# Altium PCB 双595.pcbdoc
Units mm, origin at the board's own origin, x right, y up, seen from the top; angles counter-clockwise.
Board outline 28.55 x 49.83 mm, 2 copper layers (Top Layer, Bottom Layer); 12 components, 155 nets, 89 pads, 42 vias.
Unrouted connection lines stored in the file: 101.
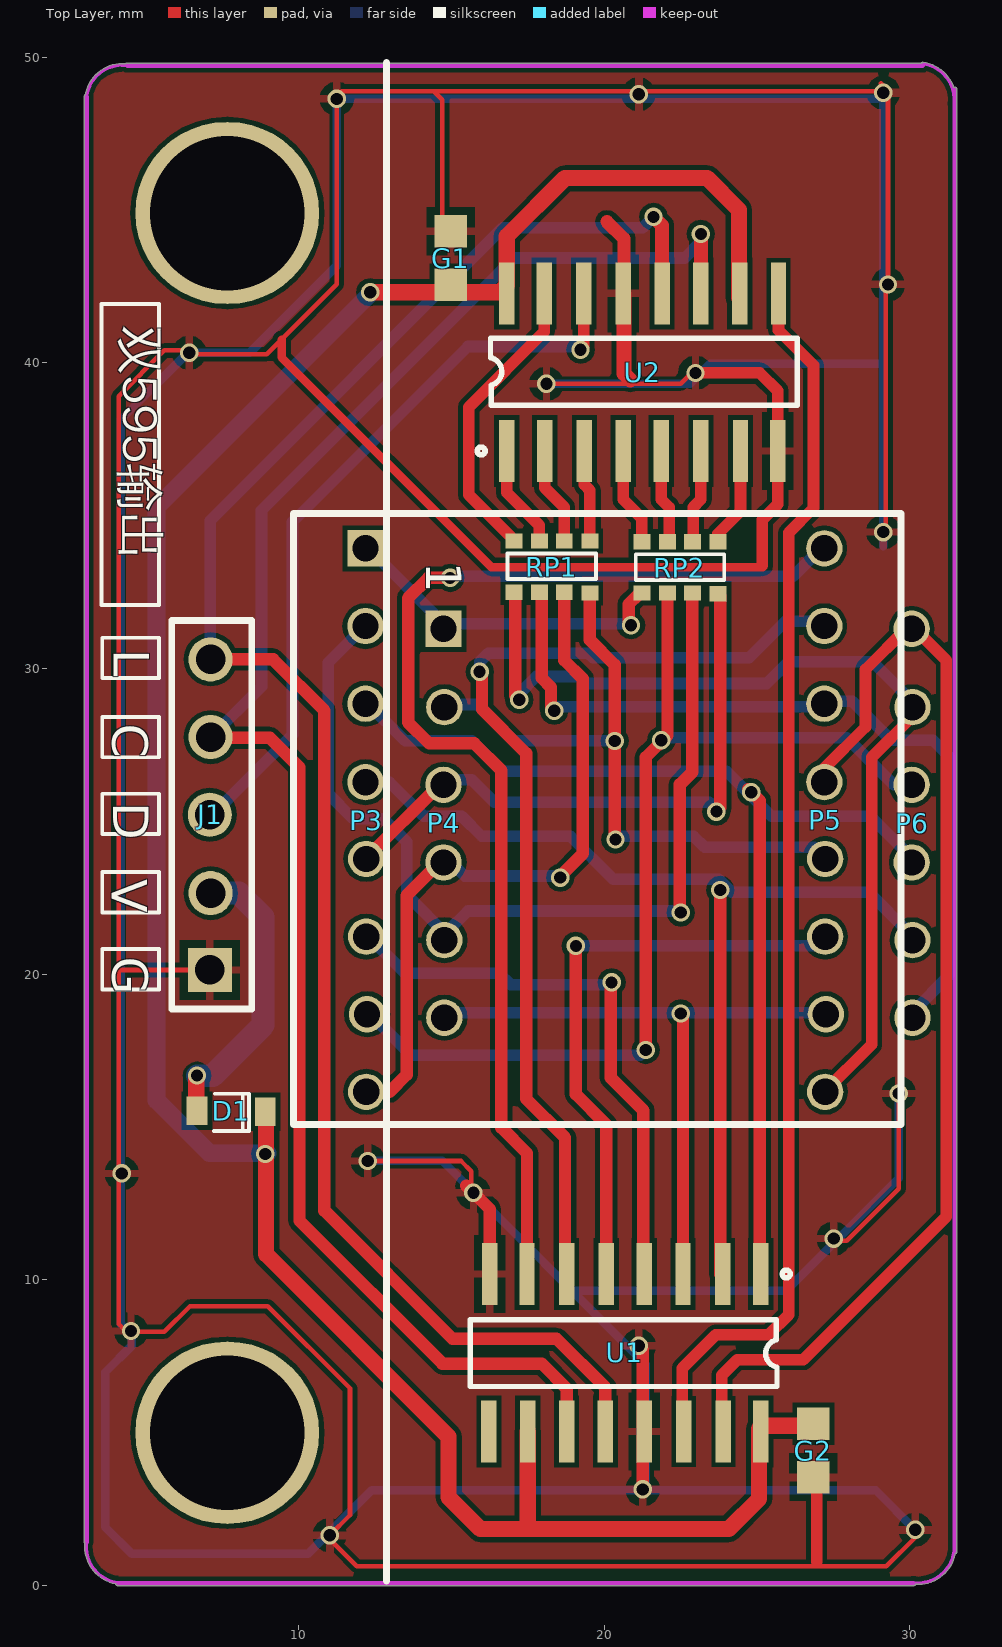
[diagram p0: Top Layer view]
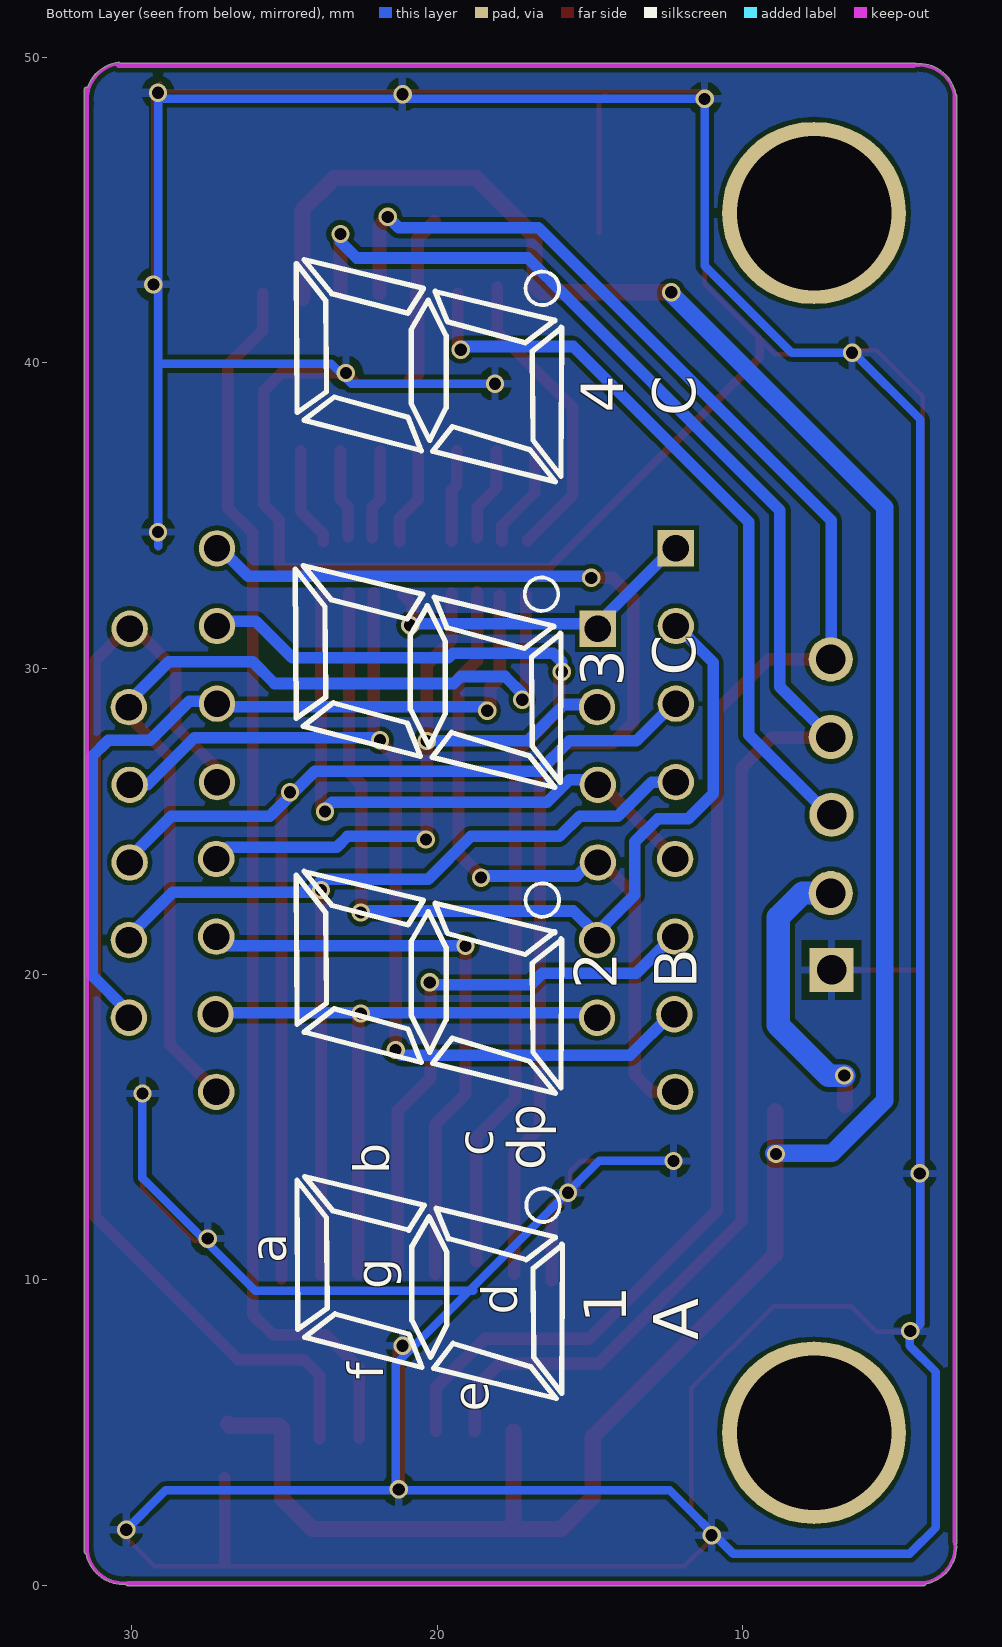
[diagram p1: Bottom Layer view, seen from below]

## Layer stack, top to bottom
Top Solder: solder mask 0.0102, Solder Resist, Dk 3.5
Top Layer: signal copper 0.0356
Dielectric 1: dielectric 0.32, FR-4, Dk 4.8
Bottom Layer: signal copper 0.0356
Bottom Solder: solder mask 0.0102, Solder Resist, Dk 3.5

## Board outline
3.017,1.373 ccw(c4.242,1.27) 4.015,0.062 ccw(c4.089,0.076) 4.089,0.001 30.124,0.001 ccw(c30.124,0.076) 30.192,0.043 ccw(c30.277,1.27) 31.485,1.044 ccw(c31.471,1.118) 31.546,1.118 31.546,48.946 ccw(c31.471,48.946) 31.44,49.015 ccw(c30.277,48.616) 30.436,49.835 ccw(c30.429,49.784) 30.384,49.809 4.394,49.809 ccw(c4.394,49.733) 4.345,49.79 ccw(c4.242,48.565) 3.031,48.78 ccw(c3.073,48.717) 2.998,48.717 2.998,1.422 ccw(c3.073,1.422)
cut-out: 31.474,48.946 cw(c31.524,48.946) 31.474,48.946 cw(c31.524,48.946) 31.474,48.947 cw(c30.534,48.946)
cut-out: 31.474,48.946 cw(c31.524,48.946) 31.474,48.946 cw(c31.524,48.946) 31.474,48.947 cw(c30.534,48.946)

## Design rules (kind name [scope] priority, off if disabled: settings)
Clearance [All] p1: gap=0.152 ignorepadtopadclearanceinfootprint=FALSE
HoleToHoleClearance [All] p1: gap=0.203 allowstackedmicrovias=TRUE
PolygonConnect [All] p1: connectstyle=Relief reliefconductorwidth=0.254 reliefentries=4 polygonreliefangle="90 Angle" airgapwidth=0.254
RoutingVias [All] p1: holewidth=6 width=8 viastyle="Through Hole" minholewidth=0.3 minwidth=0.6 maxholewidth=0.711 maxwidth=1.27
SilkToSilkClearance [All] p1: silktosilkclearance=0.152
SolderMaskExpansion [All] p1: expansion=0.102
Width [All] p1: maxlimit=5 minlimit=0.203 preferedwidth=0.254
28 further rules are at their usual default settings.

## Components (designator, comment, footprint, x,y, rotation, side; value= is the part's Value field where it differs from the comment)
D1 "S4" COMPONENT_6 7.798,15.519 r0 top
G1 "104" COMPONENT_5 14.989,43.434 r180 top
G2 "104" COMPONENT_5 26.851,4.42 r180 top
J1 "2.54排针5P黑色" COMPONENT_1 7.115,25.222 r0 top
P3 "8P圆孔排母DS18B20" COMPONENT_2#1 12.22,25.044 r0 top
P4 "6P圆孔排母DS18B20" COMPONENT_3#1 14.76,24.943 r0 top
P5 "8P圆孔排母DS18B20" COMPONENT_2#2 27.232,25.044 r0 top
P6 "6P圆孔排母DS18B20" COMPONENT_3#2 30.076,24.943 r0 top
RP1 "220R" COMPONENT_7 18.291,33.325 r0 top
RP2 "220R" COMPONENT_7 22.482,33.299 r0 top
U1 "74HC595D" COMPONENT_4 20.678,7.62 r180 top
U2 "74HC595D" COMPONENT_4 21.263,39.7 r0 top

## Footprints (in the part's own frame and the unit in brackets; to place one, negate y for a bottom-side part, rotate by r counter-clockwise, add the part's x,y. Pads: shape width x height; smd on the part's side, far side on the other; paste and mask are expansions set on the pad)
COMPONENT_1 [mil]
  rect 56.84x56.84 hole 38: 1(-0.5,-200)
  round 56.84 hole 38: 2(0.5,-101) 3(-0.5,0) 4(0.5,100) 5(0.5,200)
  silkscreen extent -50,-250 54,250
COMPONENT_2#1 [mil]
  rect 46.84x46.84 hole 34: 1(-1,350)
  round 46.84 hole 34: 2(-1,250) 3(-1,150) 4(-1,49) 5(0,-50) 6(0,-150) 7(1,-250) 8(0,-350)
COMPONENT_2#2 [mil]
  round 46.84 hole 34: 1(-1,350) 2(-1,250) 3(-1,150) 4(-1,49) 5(0,-50) 6(0,-150) 7(1,-250) 8(0,-350)
COMPONENT_3#1 [mil]
  rect 46.84x46.84 hole 34: 1(-0.5,250.5)
  round 46.84 hole 34: 2(0.5,149.5) 3(-0.5,49.5) 4(-0.5,-50.5) 5(0.5,-150.5) 6(0.5,-250.5)
COMPONENT_3#2 [mil]
  round 46.84 hole 34: 1(-0.5,250.5) 2(0.5,149.5) 3(-0.5,49.5) 4(-0.5,-50.5) 5(0.5,-150.5) 6(0.5,-250.5)
COMPONENT_4 [mil]
  rect 19.84x79.84 smd: 1(-175,-101.5) 2(-126,-101.5) 3(-75,-101.5) 4(-25,-101.5) 5(24,-101.5) 6(75,-101.5) 7(126,-101.5) 8(174,-101.5) 9(175,101.5) 10(125,101.5) 11(75,101.5) 12(25,101.5) 13(-25,101.5) 14(-76,101.5) 15(-127,101.5) 16(-175,101.5)
  silkscreen extent -213,-107 199,44
COMPONENT_5 [mil]
  rect 41.84x41.84 smd: 1(0,34.5) 2(0,-34.5)
COMPONENT_6 [mil]
  rect 26.84x36.84 smd: 1(-44,0.5) 2(44,-0.5)
  silkscreen extent -22,-26 23,22
COMPONENT_7 [mil]
  rect 21.84x19.84 smd: 1(-49,33.5) 2(-49,-32.5) 3(-16,33.5) 4(-16,-32.5) 5(16,33.5) 6(16,-32.5) 7(49,33.5) 8(49,-33.5)
  silkscreen extent -57,-16 57,18

## Free pads (board coordinates)
  oval 6.016x5.965 hole 5.055: 9(7.674,44.907) 10(7.674,5.004)

## Via types
v1: diameter 0.6, hole 0.4, Top Layer to Bottom Layer, tented both sides, 41 vias
v2: diameter 0.8, hole 0.4, Top Layer to Bottom Layer, 1 vias

## Nets (pads, with @x,y where several pads share a name; then routed paths per layer and width w, separated by ;. In a path a pad name is that pad's centre, name@x,y a point inside that pad or via, vN(x,y) a via of type N, cw(c..) or ccw(c..) an arc to the next point about the centre after c; other vN are vias at no path point)
3.3V: 
+5v: 
AOUT1: 
AOUT2: 
BOUT1: 
BOUT2: 
D+: 
D-: 
DTR: 
GND: 
M11: 
M12: 
M21: 
M22: 
Net: 
NewNet1: 
NewNet2: 
NewNet3: 
NewNet4: 
NewNet15: 
NewNet16: 
NewNet17: 
NewNet18: 
NewNet19: 
NewNet20: 
NewNet21: 
NewNet22: 
NewNet23: 
NewNet24: 
NewNet25: 
NewNet26: 
NewNet27: 
NewNet28: 
NewNet29: 
NewNet30: 
NewNet31: 
NewNet32: 
NewNet33: 
NewNet34: 
NewNet35: 
NewNet36: 
NewNet37: 
NewNet38: 
NewNet39: 
NewNet40: 
NewNet41: 
NewNet42: 
NewNet43: 
NewNet44: 
NewNet45: 
NewNet46: 
NewNet47: 
NewNet48: 
NewNet49: 
NewNet50: 
NewNet51: 
NewNet52: 
NewNet53: 
NewNet54: 
NewNet55: 
NewNet56: 
NewNet57: 
NewNet58: 
NewNet59: 
NewNet60: 
NewNet61: 
NewNet62: 
NewNet63: 
NewNet64: 
NewNet65: 
NewNet66: 
NewNet67: 
NewNet68: 
NewNet69: 
NewNet70: 
NewNet71: 
NewNet72: 
NewNet73: 
NewNet74: 
NewNet75: 
NewNet76: 
NewNet77: P5.3 P6.6 RP1.4 | length 26.7
  Top Layer w0.405: RP1.4@17.961,32.385 17.961,29.693 18.265,29.388 v1@18.265,28.651
  Bottom Layer w0.379: v1(18.367,28.626) 18.494,28.753 26.876,28.753 27.054,28.931 28.121,28.931 29.391,27.661 30.762,27.661 31.296,27.127 31.296,19.964 30.089,18.758 P6.6
NewNet78: P3.4 P6.5 U1.2 | length 32.3
  Top Layer w0.405: U1.2@23.803,10.185 v1(23.803,22.758)
  Bottom Layer w0.379: P3.4@12.423,26.289 12.982,26.289 14.1,25.171 15.344,25.171 16.005,24.511 18.9,24.511 20.297,23.114 23.752,23.114 24.184,22.682 28.654,22.682 30.026,21.311 P6.5@30.026,21.209
NewNet79: P3.3 P6.4 U1.1 | length 36.1
  Top Layer w0.405: v1@24.717,26.06 25.098,25.679 U1.1@25.098,10.058
  Bottom Layer w0.379: P3.3 12.271,28.854 13.49,27.635 15.675,27.635 16.665,26.645 24.006,26.645 25.479,25.171 28.705,25.171 P6.4@30.064,23.812
  other v1: 24.819,25.959
NewNet80: P3.7 P6.3 RP2.4 | length 33.9
  Top Layer w0.405: v1(21.364,17.526) 21.364,27.102 22.075,27.813 RP2.4
  Bottom Layer w0.379: P3.7 12.347,18.694 13.693,17.348 21.186,17.348 v1(21.364,17.526) ; v1(21.872,27.661) 21.948,27.737 27.943,27.737 29.48,26.2 P6.3
NewNet81: P5.8 P6.2 RP1.2 | length 31.7
  Top Layer w0.379: P5.8@27.155,16.104 28.756,17.704 28.756,27.102 30.089,28.435 P6.2
  Top Layer w0.405: RP1.2@17.097,32.385 17.097,29.108 v1(17.224,28.981)
  Bottom Layer w0.379: v1(17.224,28.981) 17.224,29.185 17.783,29.743 19.231,29.743 19.459,29.515 25.327,29.515 26.038,30.226 28.781,30.226 30.089,28.918 P6.2
NewNet82: P5.4 P6.1 U1.15 | length 37.4
  Top Layer w0.379: U1.15@23.853,4.801 23.853,6.883 24.361,7.391 26.52,7.391 31.194,12.065 31.194,30.277 P6.1@30.165,31.305 ; P5.4 27.206,26.746 28.552,28.092 28.552,29.972 P6.1@29.886,31.305
NewNet83: P4.6 P5.7 U1.3 | length 21.1
  Top Layer w0.405: v1(22.507,18.72) 22.583,18.644 U1.3
  Bottom Layer w0.379: P4.6 15.103,18.58 15.268,18.745 27.206,18.745 P5.7
NewNet84: P3.2 P4.5 RP2.6 | length 31.7
  Top Layer w0.405: v1@22.482,22.047 22.482,26.213 22.888,26.619 RP2.6
  Bottom Layer w0.379: P3.2@12.271,31.445 12.22,31.445 10.976,30.201 10.976,25.908 11.788,25.095 12.779,25.095 13.541,24.333 13.541,22.606 14.913,21.234 14.913,21.438 15.548,22.073 v1@22.558,22.073
  other v1: 22.507,22.022
NewNet85: P3.8 P4.4 RP1.6 | length 22.9
  Top Layer w0.405: P3.8 12.982,16.154 13.541,16.713 13.541,22.581 14.621,23.66 P4.4 ; v1(18.57,23.165) 18.57,23.216 19.307,23.952 19.307,29.667 18.697,30.277 RP1.6
  Bottom Layer w0.379: P4.4 15.002,23.66 15.446,23.216 v1@18.519,23.216
NewNet86: P3.5 P4.3 RP2.8 | length 19.9
  Top Layer w0.405: P3.5 12.22,23.8 P4.3@14.633,26.213 ; v1(23.676,25.324) 23.803,25.451 RP2.8@23.803,32.372
  Bottom Layer w0.379: P4.3 14.913,26.365 15.675,26.365 16.411,25.629 23.447,25.629 v1@23.676,25.4
NewNet87: P4.2 P5.5 RP1.8 | length 21.3
  Top Layer w0.405: RP1.8 19.535,30.937 20.348,30.124 v1@20.348,24.46
  Bottom Layer w0.379: P4.2@14.989,28.829 15.852,28.829 17.046,27.635 v1(20.348,27.635) ; v1(20.374,24.409) 20.475,24.511 22.939,24.511 23.295,24.155 26.876,24.155 P5.5@27.155,23.876
NewNet88: P3.1 P4.1 RP2.2 | length 10.9
  Top Layer w0.405: v1@20.805,31.394 20.805,32.106 RP2.2@21.11,32.41
  Bottom Layer w0.379: P3.1@12.144,34.061 12.169,34.061 14.76,31.471 v1@20.831,31.471
  other v1: 20.882,31.42
NewNet89: P5.6 U1.5 | length 19.6
  Top Layer w0.405: v1@19.078,21.006 19.078,16.078 20.069,15.088 U1.5
  Bottom Layer w0.379: v1(19.078,20.93) 26.978,20.93 P5.6@27.308,21.26
NewNet90: P5.2 U1.6 | length 32.9
  Top Layer w0.405: v1@15.929,29.972 16.005,29.896 16.005,28.677 17.453,27.229 17.453,15.926 18.723,14.656 U1.6@18.723,10.617
  Bottom Layer w0.379: v1(15.929,29.896) 15.929,30.226 16.208,30.505 19.485,30.505 19.637,30.353 24.742,30.353 25.936,31.547 27.105,31.547 P5.2@27.282,31.369
NewNet91: P5.1 U1.7 | length 38.8
  Top Layer w0.405: v1(14.963,32.969) 14.252,32.969 13.592,32.309 13.592,28.245 14.278,27.559 15.751,27.559 16.64,26.67 16.64,14.986 17.478,14.148 U1.7
  Bottom Layer w0.379: v1(14.963,32.969) 15.014,33.02 26.19,33.02 P5.1@27.105,33.934
NewNet92: P3.6 U1.4 | length 18.7
  Top Layer w0.405: v1@20.221,19.812 20.221,16.612 21.288,15.545 U1.4@21.288,10.287
  Bottom Layer w0.379: P3.6 12.296,21.234 13.49,20.041 16.564,20.041 16.945,19.66 v1@20.297,19.66
  other v1: 20.247,19.736
NewNet93: J1.5 U1.12 U2.12 | length 59.4
  Top Layer w0.405: J1.5@7.42,30.302 9.172,30.302 10.849,28.626 10.849,12.268 15.04,8.077 18.443,8.077 20.043,6.477 U1.12
  Top Layer w0.456: v1(21.618,44.78) 21.898,44.501 U2.12
  Bottom Layer w0.379: J1.5@7.115,30.226 7.115,34.849 16.691,44.425 21.263,44.425 v1(21.618,44.78)
NewNet94: J1.4 U1.11 U2.11 | length 58.9
  Top Layer w0.405: J1.4@7.115,27.686 7.166,27.737 9.071,27.737 10.036,26.772 10.036,11.938 14.709,7.264 17.961,7.264 18.773,6.452 U1.11
  Top Layer w0.456: U2.11 v1@23.168,44.145
  Bottom Layer w0.379: J1.4@7.14,27.762 8.791,29.413 8.791,35.179 17.046,43.434 22.634,43.434 23.168,43.967 v1@23.168,44.323
  other v1: 23.168,44.221
NewNet95: J1.3 U2.14 | length 24.4
  Top Layer w0.379: v1(19.231,40.437) 19.332,40.538 U2.14
  Bottom Layer w0.379: J1.3@7.115,25.146 9.807,27.838 9.807,34.798 15.548,40.538 v1@19.129,40.538
NewNet96: D1.1 J1.2 | length 9.3
  Top Layer w0.532: D1.1@6.658,15.735 v1@6.658,16.662
  Bottom Layer w0.735: v1(6.683,16.688) 7.191,16.688
  Bottom Layer w0.76: J1.2 8.055,22.657 8.842,21.869 8.842,18.339 7.191,16.688
NewNet97: G1.2 G2.1 J1.1 U1.8 U1.13 U2.8 U2.13 | length 334.7
  Top Layer w0.151: 4.143,20.142 J1.1 ; v1@6.353,40.284 8.969,40.284 11.255,42.57 v1(11.255,48.641) ; v1@6.404,40.411 5.616,40.411 4.118,38.913 4.118,8.56 4.372,8.306 5.616,8.306 6.454,9.144 8.994,9.144 11.687,6.452 11.687,2.311 v1(11.026,1.651) ; v1@11.026,1.524 11.915,0.635 29.238,0.635 30.178,1.575 v1(30.178,1.829) ; v1@11.179,48.666 11.407,48.895 v1@29.06,48.895 ; v1(12.271,13.894) 15.319,13.894 15.649,13.564 v1@15.649,12.903 ; 14.43,48.895 14.709,48.616 G1.2@14.709,44.247 ; v1(18.113,39.319) 22.507,39.319 v1@22.914,39.726 ; v1@27.435,11.278 27.943,11.278 29.645,12.979 v1(29.645,16.104) ; 29.06,49.149 29.289,48.92 v1(29.289,42.57) ; v1@29.213,34.569 v1@29.213,42.697
  Top Layer w0.278: 9.452,40.767 9.452,40.183 16.31,33.325 25.123,33.325 25.174,33.376
  Top Layer w0.379: v1(22.99,39.675) 25.098,39.675 25.682,39.091 25.682,35.382 25.174,34.874 25.174,33.376 ; 26.952,0.787 26.952,1.118 ; 26.952,0.94 G2.1@26.952,3.531
  Top Layer w0.405: 15.497,13.081 16.259,12.319 U1.8@16.259,9.982 ; v1(21.136,7.849) 21.263,7.722 v1(21.263,3.15)
  Top Layer w0.43: 20.094,44.628 20.653,44.069 U2.13@20.653,42.164
  Top Layer w0.481: U2.13@20.653,42.266 20.653,39.649 20.856,39.446
  Bottom Layer w0.278: v1(12.271,13.894) 14.709,13.894 21.364,7.239 v1@21.364,3.124 ; v1(18.113,39.319) 22.812,39.319 23.472,39.98 29.137,39.98 ; 18.824,9.652 25.962,9.652 29.645,13.335 v1(29.645,16.104) ; 29.137,34.011 v1(29.137,48.844) 28.933,48.641 v1(11.255,48.641) 11.255,43.18 8.41,40.335 v1(6.429,40.335) 6.378,40.335 4.194,38.151 4.194,8.56 4.549,8.204 4.549,7.849 3.686,6.985 3.686,1.905 4.549,1.041 10.315,1.041 12.398,3.124 28.883,3.124 v1(30.178,1.829)
  other v1: 4.524,8.331 27.511,11.354 15.725,12.852 4.219,13.487 29.137,34.468 21.136,48.793
NewNet100: 
NewNet102: 
NewNet104: 
NewNet105: 
NewNet107: 
NewNet112: 
NewNet113: 
NewNet115: 
NewNet116: 
NewNet117: 
NewNet118: 
NewNet119: 
NewNet120: 
NewNet121: 
NewNet122: 
NewNet123: 
NewNet124: 
NewNet125: 
NewNet126: 
NewNet127: 
NewNet128: 
NewNet129: 
NewNet130: 
NewNet131: 
NewNet132: 
NewNet133: 
NewNet134: 
NewNet135: 
NewNet136: 
NewNet137: 
NewNet138: 
NewNet139: 
NewNet140: 
NewNet141: 
NewNet142: RP2.7 U2.7 | length 3.3
  Top Layer w0.379: RP2.7 23.726,34.417 24.463,35.154 U2.7
NewNet143: RP2.5 U2.6 | length 2.9
  Top Layer w0.379: RP2.5@22.914,34.315 22.914,35.281 23.168,35.535 U2.6
NewNet144: RP2.3 U2.5 | length 2.9
  Top Layer w0.379: U2.5 21.872,35.535 22.126,35.281 RP2.3@22.126,34.29
NewNet145: RP2.1 U2.4 | length 3.3
  Top Layer w0.379: U2.4@20.628,37.211 20.628,35.535 21.237,34.925 RP2.1
NewNet146: RP1.7 U2.3 | length 3
  Top Layer w0.379: U2.3 19.358,36.017 19.535,35.839 RP1.7
NewNet147: RP1.5 U2.2 | length 3.1
  Top Layer w0.379: U2.2 18.062,35.916 18.697,35.281 RP1.5@18.697,34.29
NewNet148: RP1.3 U2.1 | length 3.4
  Top Layer w0.379: U2.1 16.818,35.763 17.884,34.696 RP1.3
NewNet149: RP1.1 U2.15 | length 9.9
  Top Layer w0.379: RP1.1 17.046,34.214 15.573,35.687 15.573,38.557 18.037,41.021 U2.15@18.037,42.494
NewNet150: D1.2 G1.1 G2.2 U1.10 U1.16 U2.10 U2.16 | length 85
  Top Layer w0.532: D1.2@8.944,15.519 8.944,10.846 14.913,4.877 14.913,2.896 15.954,1.854 24.082,1.854 25.073,2.845 25.073,5.131 25.174,5.232 26.787,5.232 G2.2 ; v1(12.347,42.316) 16.589,42.316 16.818,42.545 16.818,44.145 18.723,46.05 23.371,46.05 24.412,45.009 U2.10@24.412,42.139 ; 17.503,1.854 U1.10
  Bottom Layer w0.583: v1@8.994,14.148 7.089,14.148 5.362,15.875 5.362,35.281 12.347,42.266 v1(12.347,42.316)
  other v1: 8.918,14.122
NewNet151: U1.14 U2.9 | length 40.7
  Top Layer w0.379: U1.14@22.558,4.826 22.558,7.112 23.65,8.204 25.377,8.204 26.038,8.865 26.038,34.442 26.851,35.255 26.851,39.929 25.708,41.072 U2.9
R1: 
R2: 
RTS: 
RXD: 
TXD: 
V3: 
VBUS: 
VIN: 
VM: 
pads on no net: U1.9
copper on no net:
  other v2: 6.528,158.623

## Polygon pours and split planes (outlines as drawn)
NewNet97 on Top Layer "Top Layer-No Net" (solid, pour order 4): 3.017,1.373 ccw(c4.242,1.27) 4.015,0.062 ccw(c4.089,0.076) 4.089,0.001 30.124,0.001 ccw(c30.124,0.076) 30.192,0.043 ccw(c30.277,1.27) 31.485,1.044 ccw(c31.471,1.118) 31.546,1.118 31.546,48.946 ccw(c31.471,48.946) 31.44,49.015 ccw(c30.277,48.616) 30.436,49.835 ccw(c30.429,49.784) 30.384,49.809 4.394,49.809 ccw(c4.394,49.733) 4.345,49.79 ccw(c4.242,48.565) 3.031,48.78 ccw(c3.073,48.717) 2.998,48.717 2.998,1.422 ccw(c3.073,1.422)
NewNet97 on Bottom Layer "Top Layer-No Net1" (solid, pour order 5): 3.017,1.373 ccw(c4.242,1.27) 4.015,0.062 ccw(c4.089,0.076) 4.089,0.001 30.124,0.001 ccw(c30.124,0.076) 30.192,0.043 ccw(c30.277,1.27) 31.485,1.044 ccw(c31.471,1.118) 31.546,1.118 31.546,48.946 ccw(c31.471,48.946) 31.44,49.015 ccw(c30.277,48.616) 30.436,49.835 ccw(c30.429,49.784) 30.384,49.809 4.394,49.809 ccw(c4.394,49.733) 4.345,49.79 ccw(c4.242,48.565) 3.031,48.78 ccw(c3.073,48.717) 2.998,48.717 2.998,1.422 ccw(c3.073,1.422)

## Keep-outs
Keep-Out Layer:
  lines w0.102: 3.073,1.422 ccw(c4.242,1.27) 4.089,0.102 ; 3.073,48.717 cw(c4.242,48.565) 4.394,49.733 ; 30.124,0.102 ccw(c30.277,1.27) 31.445,1.118 ; 30.429,49.784 cw(c30.277,48.616) 31.445,48.463
  lines w0.15: 3.073,1.422 3.073,48.717 ; 4.089,0.076 30.124,0.076 ; 4.394,49.733 30.429,49.733 ; 31.471,1.118 31.471,48.946

## Silkscreen, mask and mechanical layers (free items; w line width, h text height)
Top Overlay:
  lines w0.125: 3.584,20.803 3.584,19.507 5.438,19.507 5.438,20.828 3.584,20.828 ; 3.584,23.317 3.584,22.022 5.438,22.022 5.438,23.343 3.584,23.343 ; 3.584,25.883 3.584,24.587 5.438,24.587 5.438,25.908 3.584,25.908 ; 3.584,28.397 3.584,27.102 5.438,27.102 5.438,28.423 3.584,28.423 ; 3.584,30.988 3.584,29.693 5.438,29.693 5.438,31.013 3.584,31.013 ; 3.559,32.08 3.559,41.935 5.438,41.935 5.438,32.08 3.559,32.08
  lines w0.227: 12.881,0.152 12.881,49.835 ; 9.833,15.088 9.833,35.077 29.721,35.077 29.721,15.088 9.833,15.088
  text "双595输出" at 3.873,41.209 h2 r270
  text "1" at 14.176,33.503 h1.17 r270
  text "L" at 3.965,30.632 h1.17 r270
  text "C" at 3.914,28.194 h1.17 r270
  text "D" at 3.94,25.629 h1.17 r270
  text "V" at 3.889,23.114 h1.17 r270
  text "G" at 3.914,20.574 h1.17 r270
Bottom Overlay:
  circle w0.125: c16.538,12.446 r0.548
  circle w0.125: c16.564,22.428 r0.548
  circle w0.125: c16.589,32.436 r0.548
  circle w0.125: c16.564,42.443 r0.548
  lines w0.176: 15.929,11.176 15.903,11.151 ; 15.954,21.158 15.929,21.133 ; 15.954,41.173 15.929,41.148 ; 15.979,31.166 15.954,31.14 ; 16.132,11.379 16.132,11.405 ; 16.157,21.361 16.157,21.387 ; 16.157,41.377 16.157,41.402 ; 16.183,31.369 16.183,31.394 ; 15.903,11.151 16.868,10.389 16.843,7.468 15.929,6.299 15.903,11.151 ; 15.929,21.133 16.894,20.371 16.868,17.45 15.954,16.281 15.929,21.133 ; 15.929,41.148 16.894,40.386 16.868,37.465 15.954,36.297 15.929,41.148 ; 15.954,31.14 16.919,30.378 16.894,27.457 15.979,26.289 15.954,31.14 ; 16.132,11.405 17.097,10.668 19.637,11.354 20.043,12.344 16.132,11.405 ; 16.157,21.387 17.122,20.65 19.662,21.336 20.069,22.327 16.157,21.387 ; 16.157,41.402 17.122,40.665 19.662,41.351 20.069,42.342 16.157,41.402 ; 16.183,31.394 17.148,30.658 19.688,31.344 20.094,32.334 16.183,31.394 ; 16.106,6.121 20.12,7.112 19.485,7.925 16.945,7.163 16.106,6.121 ; 16.132,16.104 20.145,17.094 19.51,17.907 16.97,17.145 16.132,16.104 ; 16.132,36.119 20.145,37.109 19.51,37.922 16.97,37.16 16.132,36.119 ; 16.157,26.111 20.17,27.102 19.535,27.915 16.995,27.153 16.157,26.111 ; 19.688,8.534 20.221,7.468 20.831,8.687 20.831,11.1 20.272,12.065 19.688,10.897 19.688,8.534 ; 19.713,18.517 20.247,17.45 20.856,18.669 20.856,21.082 20.297,22.047 19.713,20.879 19.713,18.517 ; 19.713,38.532 20.247,37.465 20.856,38.684 20.856,41.097 20.297,42.062 19.713,40.894 19.713,38.532 ; 19.739,28.524 20.272,27.457 20.882,28.677 20.882,31.09 20.323,32.055 19.739,30.886 19.739,28.524 ; 20.424,12.446 20.932,11.633 23.422,12.268 24.336,13.386 20.424,12.446 ; 20.45,22.428 20.958,21.615 23.447,22.25 24.361,23.368 20.45,22.428 ; 20.45,42.443 20.958,41.631 23.447,42.266 24.361,43.383 20.45,42.443 ; 20.475,32.436 20.983,31.623 23.472,32.258 24.387,33.376 20.475,32.436 ; 20.501,7.137 20.932,8.23 23.345,8.89 24.336,8.128 20.501,7.137 ; 20.526,17.12 20.958,18.212 23.371,18.872 24.361,18.11 20.526,17.12 ; 20.526,37.135 20.958,38.227 23.371,38.887 24.361,38.125 20.526,37.135 ; 20.551,27.127 20.983,28.219 23.396,28.88 24.387,28.118 20.551,27.127 ; 23.599,9.068 23.625,12.04 24.59,13.259 24.565,8.382 23.599,9.068 ; 23.625,19.05 23.65,22.022 24.615,23.241 24.59,18.364 23.625,19.05 ; 23.625,39.065 23.65,42.037 24.615,43.256 24.59,38.379 23.625,39.065 ; 23.65,29.058 23.676,32.029 24.641,33.249 24.615,28.372 23.65,29.058
  text "4" at 13.922,38.379 h1.4 r270
  text "C" at 11.56,38.252 h1.4 r270
  text "C" at 11.56,29.769 h1.4 r270
  text "3" at 13.922,29.413 h1.4 r270
  text "B" at 11.509,19.533 h1.4 r270
  text "2" at 14.125,19.507 h1.4 r270
  text "c" at 18.164,14.046 h1.17 r270
  text "dp" at 16.462,13.589 h1.24 r270
  text "b" at 21.567,13.462 h1.17 r270
  text "a" at 24.946,10.541 h1.17 r270
  text "g" at 21.491,9.703 h1.17 r270
  text "A" at 11.458,9.398 h1.47 r270
  text "d" at 17.376,8.865 h1.17 r270
  text "1" at 13.82,8.585 h1.4 r270
  text "f" at 21.771,6.731 h1.17 r270
  text "e" at 18.316,5.69 h1.17 r270